# Altium PCB Sensor.PcbDoc
Units mil, origin at the board's own origin, x right, y up, seen from the top; angles counter-clockwise.
Board outline 650 x 1050 mil, 2 copper layers (Top Layer, Bottom Layer); 23 components, 16 nets, 87 pads, 24 vias.
Unrouted connection lines stored in the file: 1.
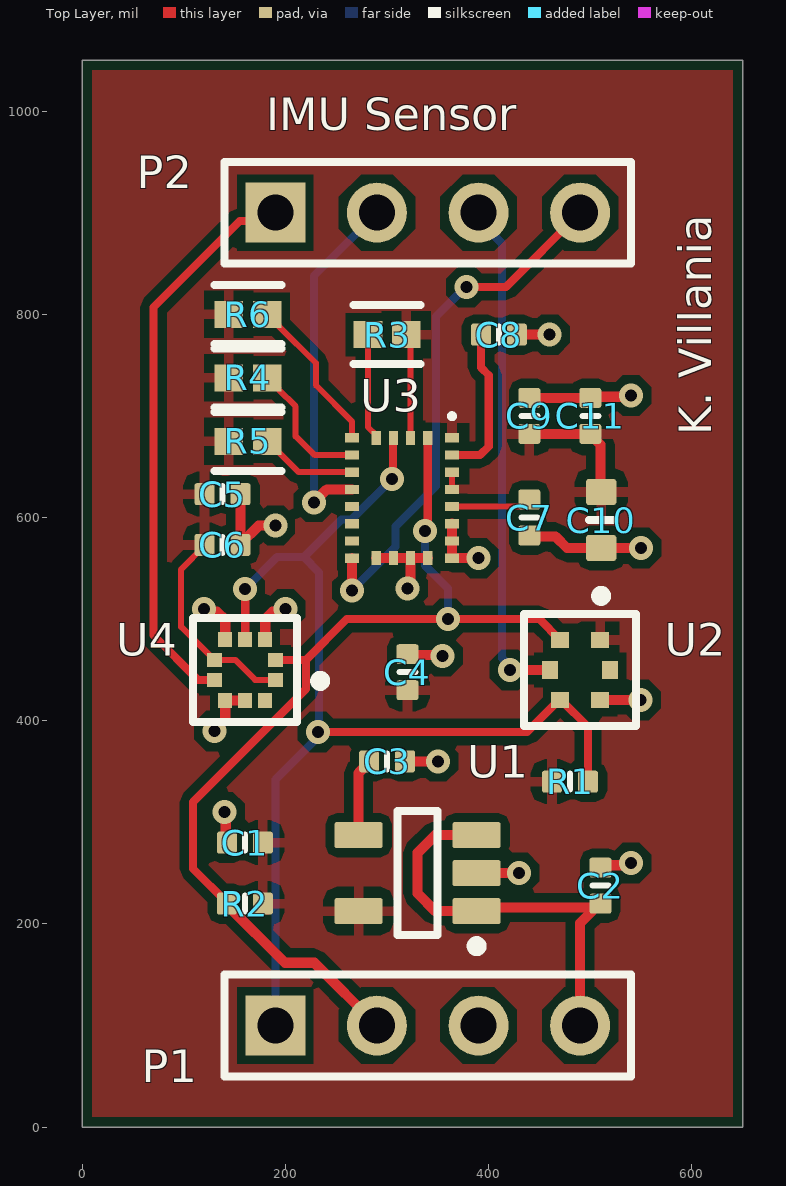
[diagram p0: Top Layer view]
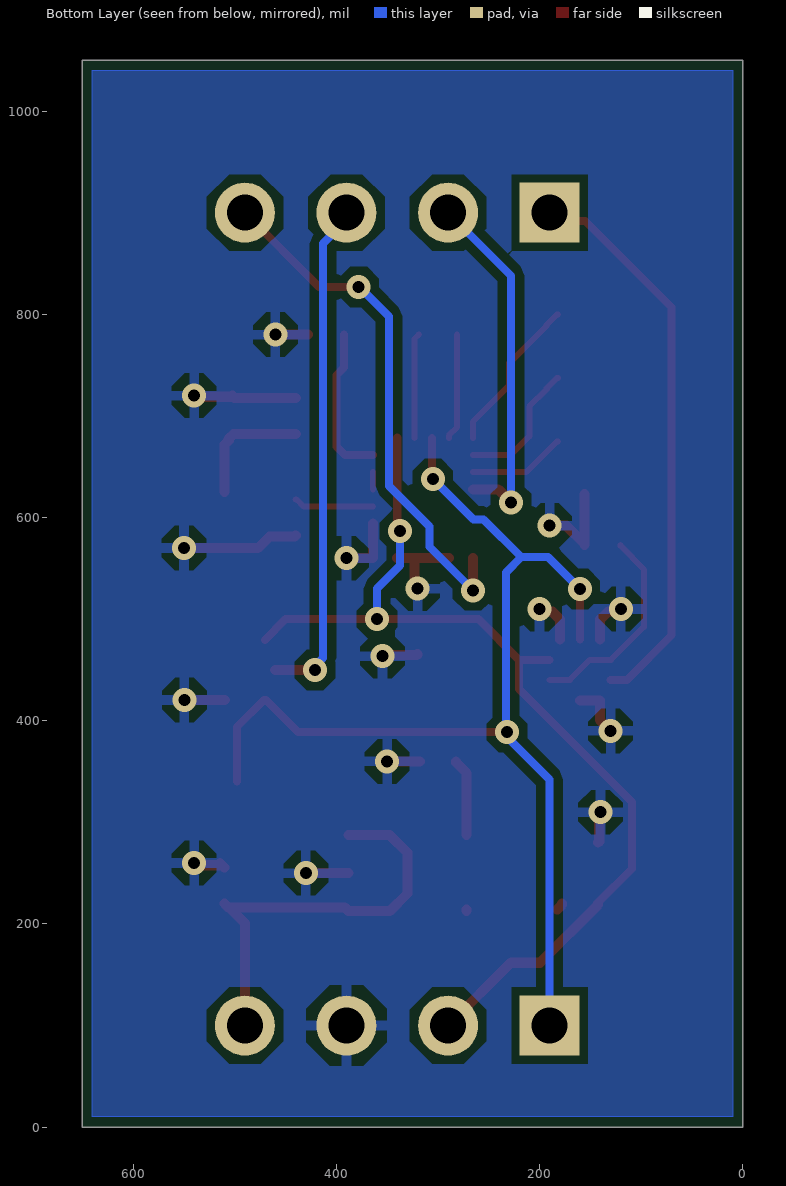
[diagram p1: Bottom Layer view, seen from below]
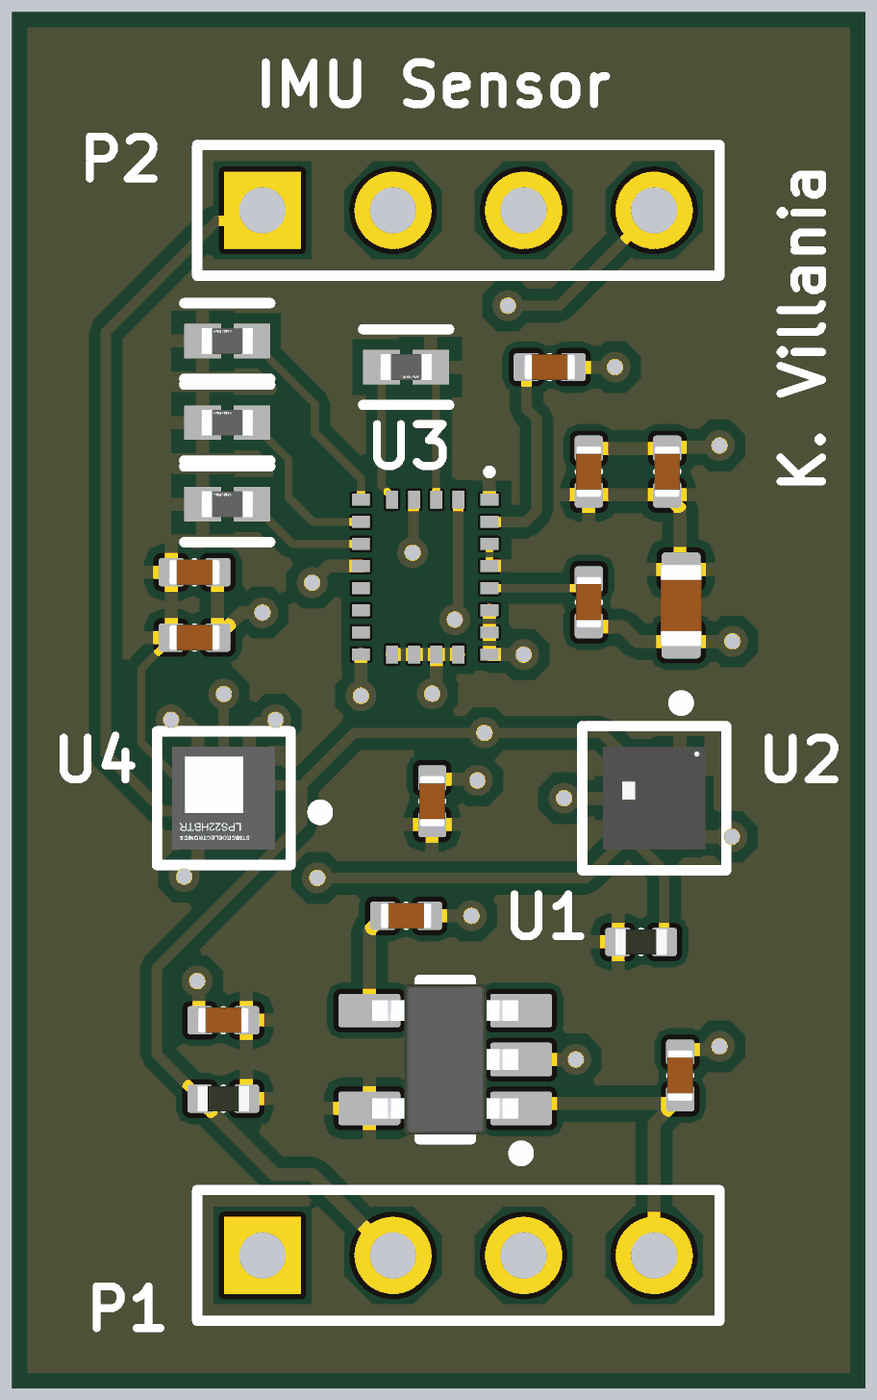
[diagram p2: 3D render of the assembled board from above, using the file's embedded part models]

## Layer stack, top to bottom
Top Solder: solder mask 0.4, Solder Resist, Dk 3.5
Top Layer: signal copper 1.4
Dielectric 1: dielectric 12.6, FR-4, Dk 4.8
Bottom Layer: signal copper 1.4
Bottom Solder: solder mask 0.4, Solder Resist, Dk 3.5

## Board outline
0,0 650,0 650,1050 0,1050

## Design rules (kind name [scope] priority, off if disabled: settings)
Clearance [All] p1: gap=8 ignorepadtopadclearanceinfootprint=FALSE
PolygonConnect [All] p1: connectstyle=Relief reliefconductorwidth=10 reliefentries=4 polygonreliefangle="90 Angle" airgapwidth=10
RoutingVias [All] p1: holewidth=11.81 width=23.62 viastyle="Through Hole" minholewidth=11.81 minwidth=23.62 maxholewidth=11.81 maxwidth=23.62
SolderMaskExpansion [All] p1: expansion=4 istentingtop=FALSE
Width [All] p1: maxlimit=10 minlimit=6 preferedwidth=8
30 further rules are at their usual default settings.

## Components (designator, comment, footprint, x,y, rotation, side; value= is the part's Value field where it differs from the comment)
C1 "Capacitor 10µF +/-40% 6.3V 0402" CAPC0402(1005)60_L 160,280 r0 top value=10µF
C2 "Capacitor 100nF +/-20% 10V 0402" CAPC0402(1005)60_L 510,237.72 r90 top value=100nF
C3 "Capacitor 10nF +/-20% 50V 0402" CAPC0402(1005)60_L 300,360 r180 top value=10nF
C4 "Capacitor 100nF +/-20% 10V 0402" CAPC0402(1005)60_L 320,447.72 r90 top value=100nF
C5 "Capacitor 100nF +/-20% 10V 0402" CAPC0402(1005)60_L 137.97,623 r0 top value=100nF
C6 "Capacitor 100nF +/-20% 10V 0402" CAPC0402(1005)60_L 137.97,573 r0 top value=100nF
C7 "Capacitor 10nF +/-20% 50V 0402" CAPC0402(1005)60_L 440,600 r90 top value=10nF
C8 "Capacitor 100nF +/-20% 10V 0402" CAPC0402(1005)60_L 410,780 r0 top value=100nF
C9 "Capacitor 100nF +/-20% 10V 0402" CAPC0402(1005)60_L 440,700 r90 top value=100nF
C10 "Capacitor 10µF +/-20% 10V 0603" CAPC0603(1608)100_L 510.67,597.56 r90 top value=10µF
C11 "Capacitor 100nF +/-20% 10V 0402" CAPC0402(1005)60_L 500,700 r90 top value=100nF
P1 "Header 4" HDR1X4 190,100 r0 top
P2 "Header 4" HDR1X4 190,900 r0 top
R1 "Resistor 6K2  +/-5 % 0402 63 mW" RESC0402(1005)_L 480,340 r180 top value=6.2k
R2 "Resistor 6K2  +/-5 % 0402 63 mW" RESC0402(1005)_L 160,220 r0 top value=6.2k
R3 "1k" FP-RC1005-IPC_A 300,780 r0 top
R4 "1k" FP-RC1005-IPC_A 163,737.5 r180 top
R5 "1k" FP-RC1005-IPC_A 163,675 r180 top
R6 "1k" FP-RC1005-IPC_A 163,800 r180 top
U1 "TPS79333DBVR" DBV0005A_M 330,250 r180 top
U2 "HTS221TR" FP-HTS221TR-MFG 490,450 r270 top
U3 "LSM9DS1TR" STM-LGA-24_3500X3000X1000 314.61,619.25 r270 top
U4 "LPS22HBTR" FP-HLGA-10L-8479831-0 160.32,450.02 r180 top

## Footprints (in the part's own frame and the unit in brackets; to place one, negate y for a bottom-side part, rotate by r counter-clockwise, add the part's x,y. Pads: shape width x height; smd on the part's side, far side on the other; paste and mask are expansions set on the pad)
CAPC0402(1005)60_L [mm] "Chip Capacitor, Body 1.0x0.5mm, Height 0.6mm, IPC High Density"
  rrect25% 0.5x0.55 smd: 1(-0.45,0) 2(0.45,0)
  silkscreen extent 0,-0.2 0,0.2, body extent -0.5,-0.25 0.5,0.25, height 0.6
CAPC0603(1608)100_L [mm] "Chip Capacitor, Body 1.6x0.8mm, Height 1.0mm, IPC High Density"
  rrect25% 0.66x0.76 smd: 1(-0.7,0) 2(0.7,0)
  silkscreen extent 0,-0.3 0,0.3, body extent -0.8,-0.4 0.8,0.4, height 0.95
DBV0005A_M [mm] "SOT23, 5-Leads, Body 3.05x1.75mm, Pitch 0.95mm, IPC Low Density"
  rrect15% 1.2x0.65 smd: 1(-1.475,0.95) 2(-1.475,0) 3(-1.475,-0.95) 4(1.475,-0.95) 5(1.475,0.95)
  silkscreen extent -1.6,-1.55 0.5,1.95, body extent -1.42,-1.46 1.42,1.46, height 1.08
FP-HLGA-10L-8479831-0 [mm]
  rect 0.375x0.35 smd paste+0 mask+0: 1(-0.762,0.25) 2(-0.762,-0.25) 6(0.762,-0.25) 7(0.762,0.25)
  rect 0.35x0.375 smd paste+0 mask+0: 3(-0.5,-0.763) 4(0,-0.763) 5(0.5,-0.763) 8(0.5,0.763) 9(0,0.763) 10(-0.5,0.763)
  silkscreen extent -2,-1.3 1.3,1.3, body extent -1.55,-1.55 1.55,1.55, height 0.25
FP-HTS221TR-MFG [mm]
  rect 0.4x0.45 smd paste-1000 mask+0: 1(-0.75,0.5) 2(-0.75,-0.5) 4(0.75,-0.5) 5(0.75,0.5)
  rect 0.45x0.4 smd paste-1000 mask+0: 3(0,-0.75) 6(0,0.75)
  silkscreen extent -1.97,-1.4 1.4,1.4, body extent -1.55,-1.55 1.55,1.55, height 0.25
FP-RC1005-IPC_A [mil]
  rect 28.16x26.48 smd paste+0 mask+0: 1(-18.84,0) 2(18.84,0)
  silkscreen extent -33,-29 33,29, body extent -41,-21 41,21, height 10
HDR1X4 [mm] "Connector; Header; 4 Position"
  rect 1.5x1.5 hole 0.9: 1(0,0)
  round 1.5 hole 0.9: 2(2.54,0) 3(5.08,0) 4(7.62,0)
  silkscreen extent -1.27,-1.27 8.89,1.27
RESC0402(1005)_L [mm] "Chip Resistor, Body 1.0x0.5mm, IPC High Density"
  rrect25% 0.5x0.55 smd: 1(-0.45,0) 2(0.45,0)
  silkscreen extent 0,-0.2 0,0.2, body extent -0.5,-0.25 0.5,0.25, height 0.3
STM-LGA-24_3500X3000X1000 [mm] "LGA, 24-Leads, Body 3.65x3.15mm, Pitch 0.43mm"
  rect 0.23x0.35 smd mask+0.05: 1(-1.505,1.25) 6(-1.505,-1.25) 7(-1.075,-1.25) 8(-0.645,-1.25) 9(-0.215,-1.25) 10(0.215,-1.25) 11(0.645,-1.25) 12(1.075,-1.25) 13(1.505,-1.25) 18(1.505,1.25) 19(1.075,1.25) 20(0.645,1.25) 21(0.215,1.25) 22(-0.215,1.25) 23(-0.645,1.25) 24(-1.075,1.25)
  rect 0.35x0.23 smd mask+0.05: 2(-1.505,0.645) 3(-1.505,0.215) 4(-1.505,-0.215) 5(-1.505,-0.645) 14(1.505,-0.645) 15(1.505,-0.215) 16(1.505,0.215) 17(1.505,0.645)
  silkscreen extent -2.11,1.19 -1.98,1.31, body extent -1.82,-1.57 1.83,1.58, height 1.03

## Part data
C1: library part CMP-001-00074-3, "Chip Capacitor, 10µF +/-40%, 6.3V, 0402, Thickness 0.6 mm", Case/Package=0402, Max Operating Temperature=85°C, Min Operating Temperature=-55°C, Tolerance=10%, Voltage Rating=6.3V, Mounting Technology=SMT, Pins=2
C2 C4 C5 C6 C8 C9 C11: library part CMP-001-00061-3, "Chip Capacitor, 100nF +/-20%, 10V, 0402, Thickness 0.6 mm", Case/Package=0402, Max Operating Temperature=85°C, Min Operating Temperature=-55°C, Tolerance=20%, Voltage Rating=10V, Mounting Technology=SMT, Pins=2
C3 C7: library part CMP-001-00069-3, "Chip Capacitor, 10nF +/-20%, 50V, 0402, Thickness 0.6 mm", Case/Package=0402, Max Operating Temperature=85°C, Min Operating Temperature=-55°C, Tolerance=5%, Voltage Rating=50V, Mounting Technology=SMT, Pins=2
C10: library part CMP-001-00075-4, "Chip Capacitor, 10µF +/-20%, 10V, 0603, Thickness 1 mm", Case/Package=0603, Max Operating Temperature=85°C, Min Operating Temperature=-55°C, Tolerance=10%, Voltage Rating=10V, Mounting Technology=SMT, Pins=2
P1 P2: "Header, 4-Pin", LatestRevisionDate=17-Jul-2002, LatestRevisionNote="Re-released for DXP Platform.", Publisher="Altium Limited"
R1 R2: library part CMP-009-00147-3, "Chip Resistor, 6,2 kOhms, +/-5 %, 63 mW, -55 to 155 degC, 0402", Case/Package=0402, Max Operating Temperature=155°C, Min Operating Temperature=-55°C, Power=63mW, Tolerance=5%, Pins=2
R3 R4 R5 R6: library part CMP-13261-004451-1, "Res Thick Film 0402 1kΩ 1% 0.063W ±100ppm/°C Molded SMD T/R", Case Code (Imperial)=0402, Case Code (Metric)=1005, Max Operating Temperature=155°C, Max Power Dissipation=63mW, Min Operating Temperature=-55°C, Resistance=1kR, Temperature Coefficient=100ppm/°C, Tolerance=1%, Voltage Rating (DC)=50V, Case/Package=0402, Composition="Thick Film", Contact Plating=Tin, Depth=0.5mm, Features="Moisture Resistant", Height=0.016inch, Lead Free="Lead Free", Length=1mm, Military Standard=Not, Number of Terminations=2, Packaging="Tape and Reel", Radiation Hardening=No, Width=0.02inch
U1: library part CMP-0394-00364-2, "Single Output High PSRR LDO, 200 mA, Fixed 3.3 V Output, 2.7 to 5.5 V Input, 5-pin SOT-23 (DBV), -40 to 85 degC, Green (RoHS & no Sb/Br)", Manufacturer="Texas Instruments", Rating=Catalog, Accuracy(%)=2, Code_JEDEC=MO-178, ComponentLink1Description="Manufacturer URL", ComponentLink1URL=http://www.ti.com/, ComponentLink2Description=Datasheet, ComponentLink2URL=http://www.ti.com/general/docs/lit/getliterature.tsp?genericPartNumber=TPS79333&fileType=pdf, ComponentLink3Description="Package Specification", ComponentLink3URL=http://www.ti.com/litv/pdf/mpds018i, DatasheetVersion=SLVS348K, Eco-Plan="Green (RoHS & no Sb/Br)", Fixed Output Options(V)=3.3, Iout(Max)(A)=0.2, Iq(Typ)(mA)=0.2, Mounting Technology="Surface Mount", PackageDescription="5-Pin Plastic Small Outline, Body 1.60 Ãƒâ€” 2.90 mm, Pitch 0.95 mm", PackageReference=DBV0005A, PackageVersion=4073253-4/K, PartNumber=TPS79333DBVR, SubFamily="Single Channel LDO", Vdo(Typ)(mV)=102, Vin(Max)(V)=5.5, Vin(Min)(V)=2.7, Vout Adj(Max)(V)=3.3, Vout Adj(Min)(V)=3.3
U2: library part CMP-2000-06428-2, "SENS HUMI/TEMP 2.5V I2C 4.5% SMD", Max Operating Temperature=120°C, Min Operating Temperature=-40°C, Operating Supply Voltage=3.6V, Accuracy=4.5%, Interface=I2C, Lead Free="Lead Free", Mount="Surface Mount", Number of Pins=6, Output Type=SPI, Packaging="Tape and Reel", Radiation Hardening=No, Resolution=16b, Response Time=10s, Sensor Type=Temperature
U3: library part CMP-2000-06606-1, "iNEMO Inertial Module: 3D Accelerometer, 3D Gyroscope, 3D Magnetometer, 1.9 to 3.6 V, -40 to 85 degC, 24-Pin LGA, RoHS, Tape and Reel", Manufacturer=STMicroelectronics, Package Description="24-Pin Plastic Land Grid Array Package, Body 3.65 x 3.15 mm, Pitch 0.43 mm", Package Reference=LGA-24_3500X3000X1000, PartNumber=LSM9DS1, Sensor Case Style=LGA, Supply Voltage Max=3.6V, Supply Voltage Min=1.9V, Acceleration Range=±2g,±4g,±8g,±16g, Datasheet URL=http://www2.st.com/content/ccc/resource/technical/document/datasheet/1e/3f/2a/d6/25/eb/48/46/DM00103319.pdf/files/DM00103319.pdf/jcr:content/translations/en.DM00103319.pdf, Datasheet Version="Rev. 3, 03/2015", Gyroscope Range=±245°/s,±500°/s,±2000°/s, Manufacturer URL=http://www.st.com/, MEMS Module Function=Tri-AxisGyroscope,Tri-AxisAccelerometer,Tri-AxisMagnetometer, Mounting Technology=SurfaceMount, MSL=MSL3-168hours, No. of Pins=24Pins, Packaging=CutTape, Product Range=-, SVHC=NoSVHC(17-Dec-2015)
U4: library part CMP-12182-000004-1, "MEMS NANO PRESSURE SENSOR: 260-1", Manufacturer=STMicroelectronics, Max Supply Voltage=3.6V, Min Supply Voltage=1.7V, Operating Supply Current=3-12uA, Package=HLGA-10L-8479831, Temperature="-40°C to +85°C", Temperature Range High=+85°C, Temperature Range Low=-40°C, Automotive=No, Category=IC, ComponentLink2Description=Datasheet, ComponentLink2URL=https://www.st.com/resource/en/datasheet/lps22hb.pdf, Device Class L1=Sensors, Device Class L2="Pressure Sensors", Device Class L3=unset, Digikey Description="MEMS NANO PRESSURE SENSOR: 260-1", Footprint Url=https://www.st.com/content/ccc/resource/technical/document/technical_note/73/17/9c/16/dd/96/4a/01/CD00134799.pdf/files/CD00134799.pdf/jcr:content/translations/en.CD00134799.pdf, Height=0.8mm, Lead Free=Yes, Manufacturer Part Number=LPS22HBTR, Octopart=https://octopart.com/lps22hbtr-stmicroelectronics-51851131, Port Style="No Port", RoHS=TRUE, Sensor Output=I2C,SPI

## Via types
v1: diameter 23.62, hole 11.81, Top Layer to Bottom Layer, tented both sides, 24 vias

## Nets (pads, with @x,y where several pads share a name; then routed paths per layer and width w, separated by ;. In a path a pad name is that pad's centre, name@x,y a point inside that pad or via, vN(x,y) a via of type N, cw(c..) or ccw(c..) an arc to the next point about the centre after c; other vN are vias at no path point)
+3V3: C1.2 C4.1 C5.1 C6.1 C9.1 C10.2 C11.1 R1.2 R2.2 R3.2 R4.2 R5.2 R6.2 U1.5 U2.1 U3.1 U3.3 U3.22 U3.23 U4.1 U4.6 U4.10 | length 456.3
  Top Layer w6: C6.1 120.25,572.02 97.19,548.95 97.19,492.48 129.8,459.86 150.47,459.86 170.16,440.18 U4.1 ; R3.2 323.07,775.77 U3.3 ; U3.22 U3.23
  Top Layer w10: R2.2 177.72,219.02 R2.2@182.56,214.17 ; U1.5 U1.5@271.93,214.17 ; C9.1 C11.1 500.98,682.28 505.83,677.44 505.83,675.74 509.98,671.58 C10.2@509.98,625.12
+5V: C2.1 P1.4 U1.1 U1.3 | length 418.2
  Top Layer w10: U1.3 347.4,287.4 330,270 330,230 347.4,212.6 U1.1 391.77,216.3 C2.1@505.31,216.3 ; P1.4 490,200.98 C2.1@505.31,216.3 ; C2.1 506.3,216.3 C2.1@505.31,216.3
C1: C8.1 U3.24 | length 152.9
  Top Layer w8: U3.24 391.57,661.57 400,670 400,740 392.28,747.72 C8.1
CAP: C7.2 U3.21 | length 79.1
  Top Layer w6: U3.21 432.09,610.79 439.02,617.72 C7.2
DEN_A/G: P2.4 U3.13 | length 519.7
  Top Layer w8: v1(378,827) 417,827 P2.4
  Top Layer w10: v1(265.39,528.39) U3.13
  Bottom Layer w8: v1(265.39,528.39) 308.19,571.19 308.19,591.27 348,631.08 348,798 377,827 v1(378,827)
DRDY: P2.3 U2.3 | length 502.3
  Top Layer w10: v1(421,450) U2.3
  Bottom Layer w8: P2.3 390,892.61 413,869.61 413,461.69 421,453.69 v1(421,450)
DRDY_M: P2.2 U3.9 | length 353.3
  Top Layer w10: v1(228,615) 240.72,627.72 U3.9
  Bottom Layer w8: v1(228,615) 228,838 P2.2
GND: C1.1 C2.2 C3.1 C4.2 C5.2 C6.2 C7.1 C8.2 C9.2 C10.1 C11.2 P1.3 U1.2 U2.5 U3.14 U3.15 U3.16 U3.17 U3.18 U3.19 U3.20 U4.3 U4.5 U4.8 U4.9 | length 840.4
  Top Layer w10: v1(120,510) 122.61,507.39 132.61,507.39 140.63,499.37 U4.5 ; v1(130,390) 140.63,400.63 U4.8 U4.9 ; v1(140,310) 141.14,308.86 141.14,281.14 C1.1 ; C6.2 C6.2@155.69,573.98 ; C5.2 C6.2@155.69,573.98 ; U4.3 180,500 187.39,507.39 197.39,507.39 v1(200,510) ; v1(190,592) 173.7,592 C6.2@155.69,573.98 ; U3.14 U3.15 U3.16 ; C3.1 v1(350,360) ; C4.2 320.91,464.52 353.66,464.52 v1(354.57,463.62) ; v1(320,530) 323.07,533.07 U3.16 ; U3.17 U3.16 ; U3.20 U3.19 U3.18 v1(390,560) ; U1.2 v1(430,250) ; C8.2 v1(460,780) ; C7.1 441.12,581.16 465.83,581.16 476.99,570 C10.1 v1(550,570) ; C9.2 C11.2 502.28,720 503.42,718.86 538.86,718.86 v1(540,720) ; U2.5 v1(549.53,420.47) ; C2.2 514.57,260 514.57,258.97 515.83,257.72 537.72,257.72 v1(540,260)
INT_DRDY: P2.1 U4.7 | length 559.9
  Top Layer w8: U4.7 113.91,440.18 70,484.09 70,807 154.99,891.99 181.99,891.99 P2.1
NetC3_2: C3.2 U1.4 | length 76.9
  Top Layer w10: U1.4 271.93,348.66 282.28,359.02 C3.2
NetR4_1: R4.1 U3.7 | length 132.7
  Top Layer w6: R4.1 182.69,737.5 192.92,727.26 192.92,726.42 210,709.34 210,680 228.43,661.57 U3.7
NetR5_1: R5.1 U3.8 | length 96.1
  Top Layer w6: R5.1 182.69,675 213.04,644.65 U3.8
SCL: P1.2 R2.1 U2.2 U3.2 U4.2 | length 1004.9
  Top Layer w8: R2.1 142.28,220.98 109,254.27 109,320 220.1,431.1 220.1,459.86 ; U4.2 220.1,459.86 ; v1(337.29,586.7) 337.29,583.03 v1@340,580.32 ; v1@340,580 v1@340,580.32 ; U3.2 v1@340,580.32 ; U2.2 449.84,500 v1(360,500) 260.24,500 220.1,459.86
  Top Layer w10: R2.1 142.28,219.02 199.52,161.78 228.22,161.78 P1.2
  Bottom Layer w8: v1(337.29,586.7) 337.29,552.71 360,530 v1(360,500)
SDA: P1.1 R1.1 U2.4 U3.4 U4.4 | length 1112.7
  Top Layer w8: U4.4 v1(160.31,529.69) ; v1(232,389) 437.86,389 469.33,420.47 471.3,420.47 497.72,394.05 R1.1 ; v1@305.67,638.67 U3.4@305.67,678.03
  Top Layer w10: v1(305,638) v1@305.67,638.67
  Bottom Layer w6: v1(232,389) 233,388 v1@233,385
  Bottom Layer w8: v1(160.31,529.69) 191.63,561 218,561 ; P1.1 190,342 233,385 233,389 233,546 218,561 ; v1(305,638) 265.01,598.01 255.01,598.01 218,561
SDO_A/G: R3.1 U3.5 | length 104.8
  Top Layer w6: R3.1 281.16,688.92 289.21,680.87 U3.5
SDO_M: R6.1 U3.6 | length 156.6
  Top Layer w6: R6.1 182.69,800 192.92,789.76 192.92,788.92 230,751.84 230,730 265.39,694.61 U3.6
pads on no net: U2.6 U3.10 U3.11 U3.12

## Polygon pours and split planes (outlines as drawn)
GND on Bottom Layer "GND_L02_P008" (solid, pour order 8): 10,10 640,10 640,1040 10,1040
GND on Bottom Layer "GND_L02_P006" (solid, pour order 6): 10,10 640,10 640,1040 10,1040
+3V3 on Top Layer "+3V3_L01_P009" (solid, pour order 9): 10,10 640,10 640,1040 10,1040

## Silkscreen, mask and mechanical layers (free items; w line width, h text height)
Top Overlay:
  text "IMU Sensor" at 181,981 h32
  text "K. Villania" at 619,681 h32 r90
Board Outline:
  the board outline again, w4